# Altium PCB Voltage_regulator.PcbDoc
Units mil, origin at the board's own origin, x right, y up, seen from the top; angles counter-clockwise.
Board outline 3400.01 x 1145.03 mil, 2 copper layers (Top Layer, Bottom Layer); 7 components, 4 nets, 15 pads, 0 vias.
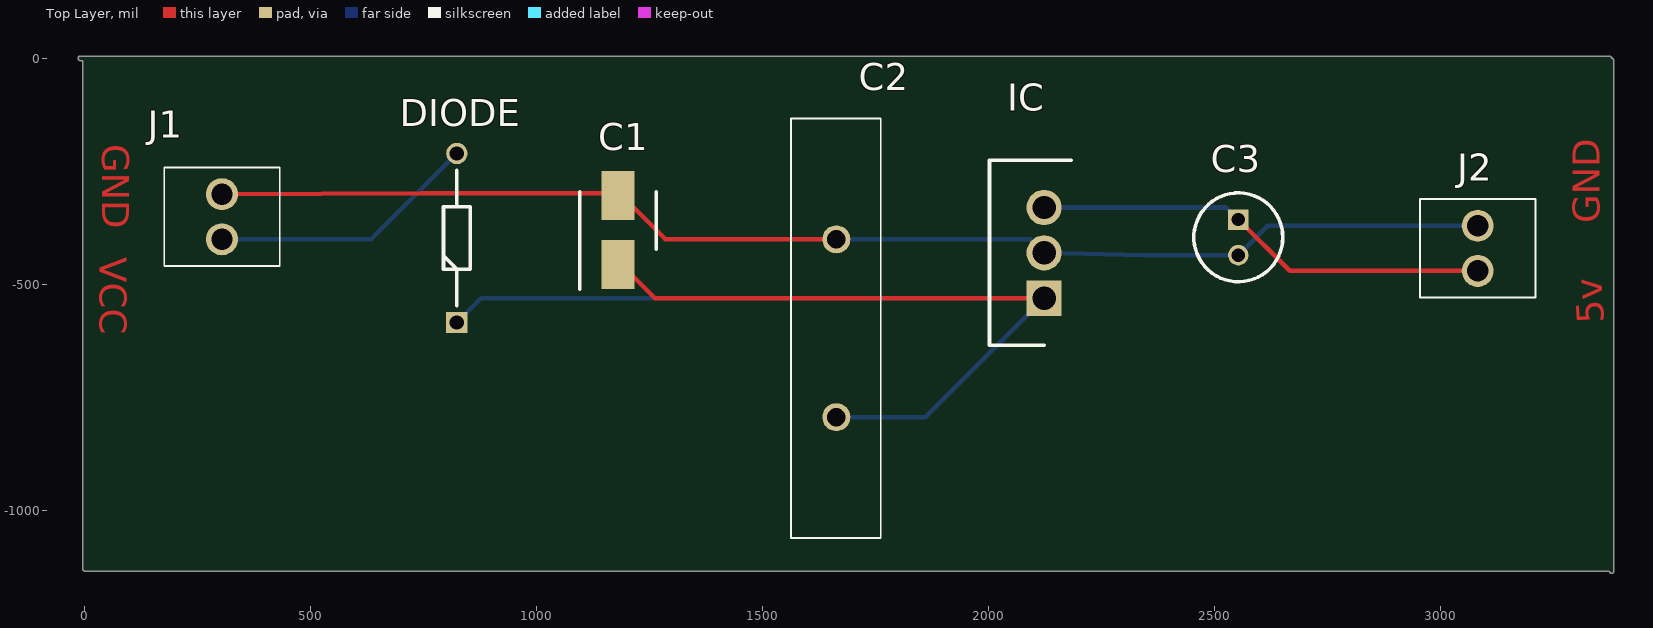
[diagram p0: Top Layer view]
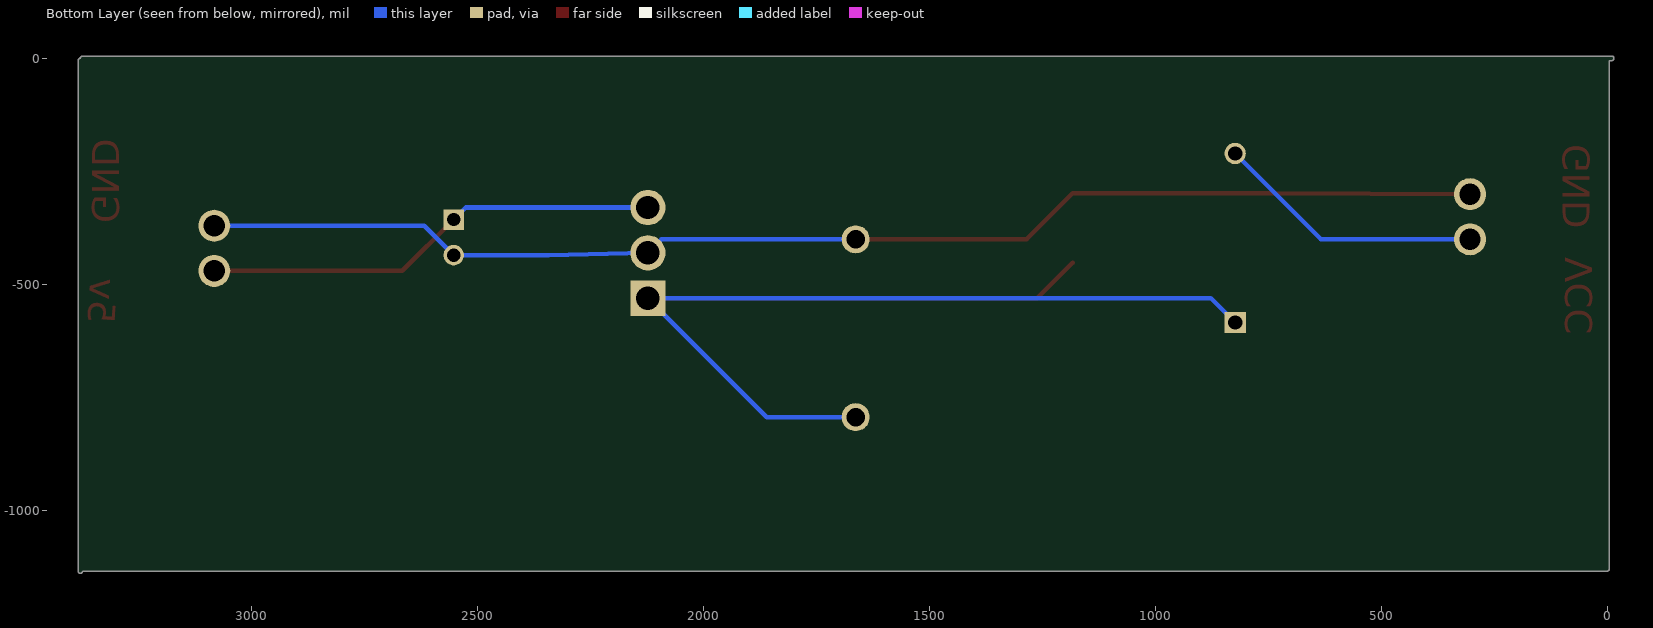
[diagram p1: Bottom Layer view, seen from below]
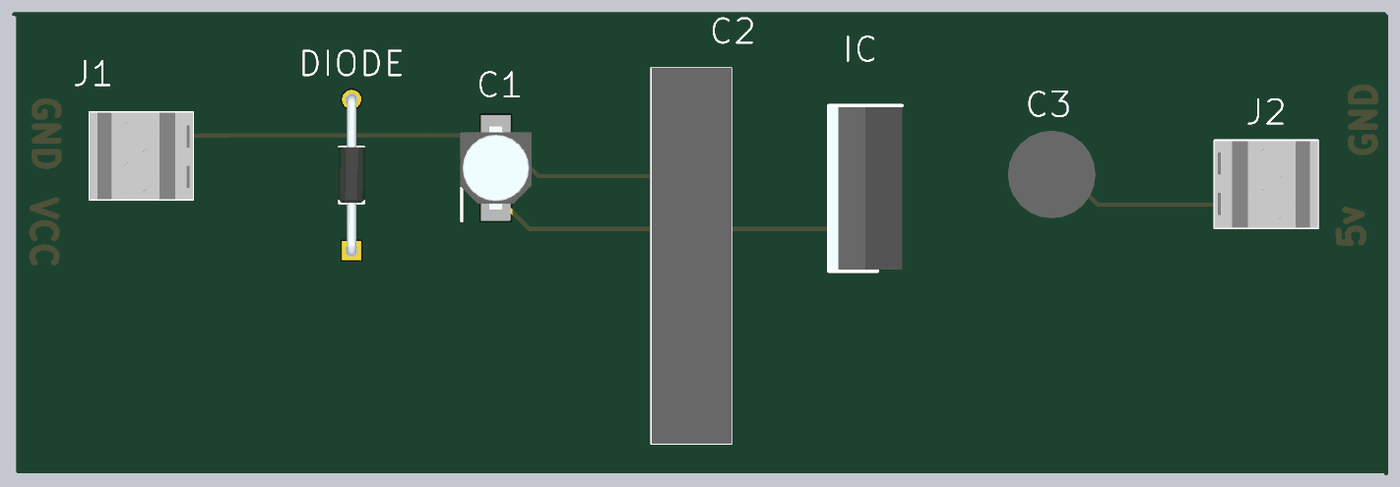
[diagram p2: 3D render of the assembled board from above, using the file's embedded part models]

## Layer stack, top to bottom
Top Solder: solder mask 0.4, Solder Resist, Dk 3.5
Top Layer: signal copper 1.4
Dielectric 1: dielectric 12.6, FR-4, Dk 4.8
Bottom Layer: signal copper 1.4
Bottom Solder: solder mask 0.4, Solder Resist, Dk 3.5

## Board outline
-5.02,-1130 -5.02,-5.02 -10,-5.02 cw(c-10,0) -10,5.02 3375,5.02 cw(c3375,0) 3380.02,0.02 cw(c3380,-5) 3385.02,-5 3385.02,-1135 cw(c3380,-1135) 3374.98,-1135.01 0,-1135.01 cw(c0,-1130)

## Design rules (kind name [scope] priority, off if disabled: settings)
Clearance [All] p1: gap=10 ignorepadtopadclearanceinfootprint=FALSE except(0: Arc-Hole Track-Hole SMDPad-Hole THPad-Hole Via-Hole Fill-Hole Poly-Hole Region-Hole Text-Hole)
PolygonConnect [All] p1: connectstyle=Relief reliefconductorwidth=10 reliefentries=4 polygonreliefangle="90 Angle" airgapwidth=10
RoutingVias [All] p1: holewidth=28 width=50 viastyle="Through Hole" minholewidth=28 minwidth=50 maxholewidth=28 maxwidth=50
SilkToSilkClearance [All] p1: silktosilkclearance=5
SilkToSolderMaskClearance [IsPad] p1: minsilkscreentomaskgap=5 clearancetoexposedcopper=TRUE
SolderMaskExpansion [All] p1: expansion=4 istentingtop=FALSE
Width [All] p1: maxlimit=10 minlimit=10 preferedwidth=10
28 further rules are at their usual default settings.

## Classes and differential pairs
component class Voltage_regulator: C1 C3 IC J1 J2

## Components (designator, comment, footprint, x,y, rotation, side; value= is the part's Value field where it differs from the comment)
C1 "0.22uF" CAPAE430X600N 1180,-380 r90 top
C2 "0.1uF" S104Z93Z5VL83L0R 1663.54,-794.31 r90 top
C3 "10uF" CAPPRD200W55D500H1250 2553.54,-356.87 r270 top
DIODE "SD103A-TR" DIOAD950W60L350D150 823.54,-584.62 r90 top
IC "L7805CV" TO255P460X1020X2008-3P 2123.54,-531 r90 top
J1 "1546215-2" 15462152 303.54,-300.61 r270 top
J2 "1546215-2" 15462152 3083.54,-470.61 r90 top

## Footprints (in the part's own frame and the unit in brackets; to place one, negate y for a bottom-side part, rotate by r counter-clockwise, add the part's x,y. Pads: shape width x height; smd on the part's side, far side on the other; paste and mask are expansions set on the pad)
15462152 [mm]
  round 1.8 hole 1.2: 1(0,0) 2(2.54,0)
  silkscreen extent -1.5,-3.25 4.04,3.25, body extent -1.46,-3.25 4,3.25, height 9.91
CAPAE430X600N [mm]
  rect 2.75x1.85 smd: 1(-1.95,0) 2(1.95,0)
  silkscreen extent -3.33,-2.15 2.15,2.15, body extent -2.6,-2.25 2.6,2.25, height 6
CAPPRD200W55D500H1250 [mm]
  rect 1.15x1.15 hole 0.75: 1(0,0)
  round 1.15 hole 0.75: 2(2,0)
  silkscreen extent -1.5,-2.5 3.5,2.5, body extent -1.74,-2.75 3.75,2.75, height 12.5
DIOAD950W60L350D150 [mm]
  rect 1.2x1.2 hole 0.8: 1(0,0)
  round 1.2 hole 0.8: 2(9.5,0)
  silkscreen extent 0.95,-0.75 8.55,0.75, body extent -0.3,-0.84 9.8,0.84, height 1.7
S104Z93Z5VL83L0R [mm]
  round 1.575 hole 1.05: 1(0,0) 2(10,0)
  silkscreen extent -6.8,-2.5 16.8,2.54, body extent -6.8,-2.5 16.8,2.5, height 23.7
TO255P460X1020X2008-3P [mm]
  rect 1.98x1.98 hole 1.32: 1(0,0)
  round 1.98 hole 1.32: 2(2.55,0) 3(5.1,0)
  silkscreen extent -2.65,-1.53 7.75,3.07, body extent -2.55,-1.53 7.65,3.07, height 19.21

## Part data
C1: library part 224SML050MD4, "Capacitor Polarised", Manufacturer_Name="ILLINOIS CAPACITOR", Mouser Part Number=598-224SML050MD4, Datasheet Link=https://www.cde.com/resources/catalogs/SML.pdf, Height=6mm, Manufacturer_Part_Number=224SML050MD4, Mouser Price/Stock=http://www.mouser.com/Search/ProductDetail.aspx?qs=3tP%252bN51vMXdw%2fVfBX1OLjg%3d%3d
C2: library part S104Z93Z5VL83L0R, "Capacitor", Manufacturer_Name=Vishay, Mouser Part Number=594-S104Z93Z5VL83L0R, Arrow Part Number=S104Z93Z5VL83L0R, Arrow Price/Stock=https://www.arrow.com/en/products/s104z93z5vl83l0r/vishay, Datasheet Link=http://www.vishay.com/docs/28546/s104z93z.pdf, Height=23.6mm, Manufacturer_Part_Number=S104Z93Z5VL83L0R, Mouser Price/Stock=https://www.mouser.co.uk/ProductDetail/Vishay-BC-Components/S104Z93Z5VL83L0R?qs=MZE%2F3ll%252Bp%2Fba6C%252BzoK7Jpg%3D%3D
C3: library part EEU-FR1H100, "Capacitor Polarised", Manufacturer_Name=Panasonic, Mouser Part Number=667-EEU-FR1H100, Datasheet Link=http://industrial.panasonic.com/cdbs/www-data/pdf/RDF0000/ABA0000C1259.pdf, Height=12.5mm, Manufacturer_Part_Number=EEU-FR1H100, Mouser Price/Stock=https://www.mouser.co.uk/ProductDetail/Panasonic/EEU-FR1H100?qs=tfZGHB2PWd1NAbdNSgjToQ%3D%3D
DIODE: "Schottky Diode", Manufacturer_Name=Vishay, Mouser Part Number=625-SD103A, Arrow Part Number=SD103A-TR, Arrow Price/Stock=https://www.arrow.com/en/products/sd103a-tr/vishay?region=nac, Datasheet Link=https://componentsearchengine.com/Datasheets/5/SD103A-TR.pdf, Manufacturer_Part_Number=SD103A-TR, Mouser Price/Stock=https://www.mouser.co.uk/ProductDetail/Vishay-Semiconductors/SD103A-TR?qs=RwahMLkpD2urFD%2FzZdGOBw%3D%3D
IC: "Integrated Circuit", Manufacturer_Name=STMicroelectronics, Mouser Part Number=511-L7805CV, Arrow Part Number=L7805CV, Arrow Price/Stock=https://www.arrow.com/en/products/l7805cv/stmicroelectronics?region=europe, Datasheet Link=http://www.st.com/web/en/resource/technical/document/datasheet/CD00000444.pdf, Height=4.6mm, Manufacturer_Part_Number=L7805CV, Mouser Price/Stock=https://www.mouser.co.uk/ProductDetail/STMicroelectronics/L7805CV?qs=9NrABl3fj%2FqplZAHiYUxWg%3D%3D
J1 J2: "Connector", Manufacturer_Name="TE Connectivity", Mouser Part Number=571-1546215-2, Arrow Part Number=1546215-2, Arrow Price/Stock=https://www.arrow.com/en/products/1546215-2/te-connectivity?region=nac, Datasheet Link=https://www.te.com/commerce/DocumentDelivery/DDEController?Action=srchrtrv&DocNm=1546215&DocType=Customer+Drawing&DocLang=English, Height=10.3mm, Manufacturer_Part_Number=1546215-2, Mouser Price/Stock=https://www.mouser.co.uk/ProductDetail/TE-Connectivity/1546215-2?qs=Lxq28tKK6BPmJFoAOY7Ljw%3D%3D

## Nets (pads, with @x,y where several pads share a name; then routed paths per layer and width w, separated by ;. In a path a pad name is that pad's centre, name@x,y a point inside that pad or via, vN(x,y) a via of type N, cw(c..) or ccw(c..) an arc to the next point about the centre after c; other vN are vias at no path point)
+5V: C3.1 IC.3 J2.1 | length 1018.2
  Top Layer w10: C3.1 2667.28,-470.61 J2.1
  Bottom Layer w10: IC.3 2526.88,-330.21 C3.1
GND: C1.2 C2.2 C3.2 IC.2 J1.1 J2.2 | length 2861.6
  Top Layer w10: J1.1 745.31,-298.83 1183.54,-298.83 1285.31,-400.61 C2.2
  Bottom Layer w10: C2.2 2093.54,-400.61 IC.2 2343.54,-435.61 C3.2 2618.54,-370.61 J2.2
NetC1_1: C1.1 C2.1 DIODE.1 IC.1 | length 2863.8
  Top Layer w10: C1.1@1183.54,-452.38 1262.16,-531 IC.1
  Bottom Layer w10: DIODE.1 877.16,-531 IC.1 1860.23,-794.31 C2.1
VCC: DIODE.2 J1.2 | length 598.7
  Bottom Layer w10: J1.2 633.54,-400.61 DIODE.2

## Other copper
Top Layer:
  text "GND" at 38.54,-190.61 h60 r270
  text "GND" at 3353.54,-365.61 h60 r90
  text "VCC" at 33.54,-440.61 h60 r270
  text "5v" at 3363.54,-585.61 h60 r93.47

## Silkscreen, mask and mechanical layers (free items; w line width, h text height)
Mechanical 1:
  lines w10: -10,0 3375,0 ; 0,-1130 3375,-1130 ; 3385,-1135 3390,-1140 ; 3385,-5 3390,-10